# Altium PCB module-footprint.PcbDoc
Units mil, origin at the board's own origin, x right, y up, seen from the top; angles counter-clockwise.
Board outline 6000 x 4000 mil, 2 copper layers (Top Layer, Bottom Layer); 3 components, 0 nets, 93 pads, 0 vias.
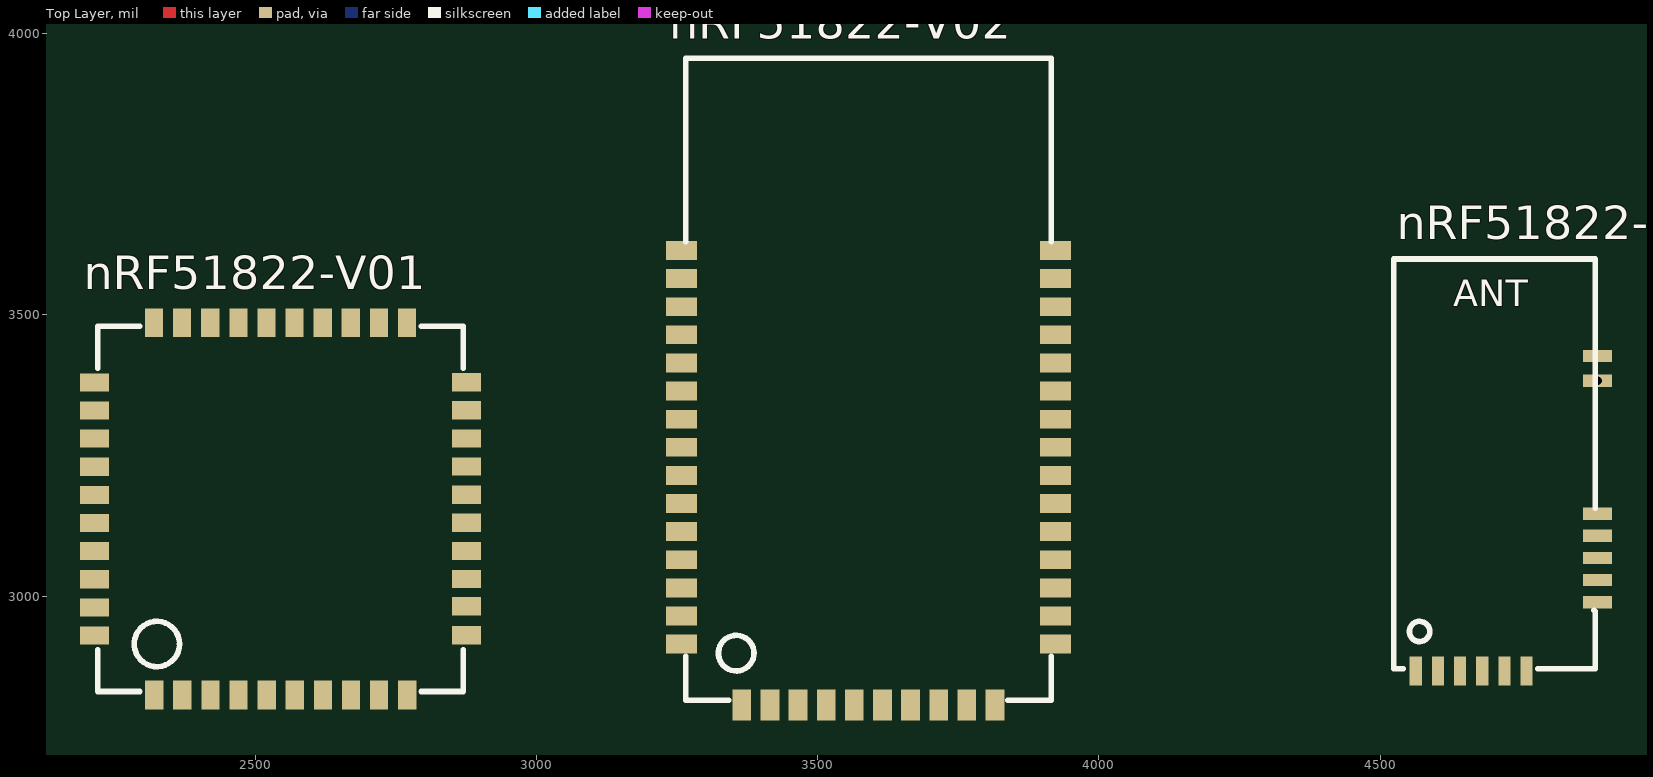
[diagram p0: Top Layer view]
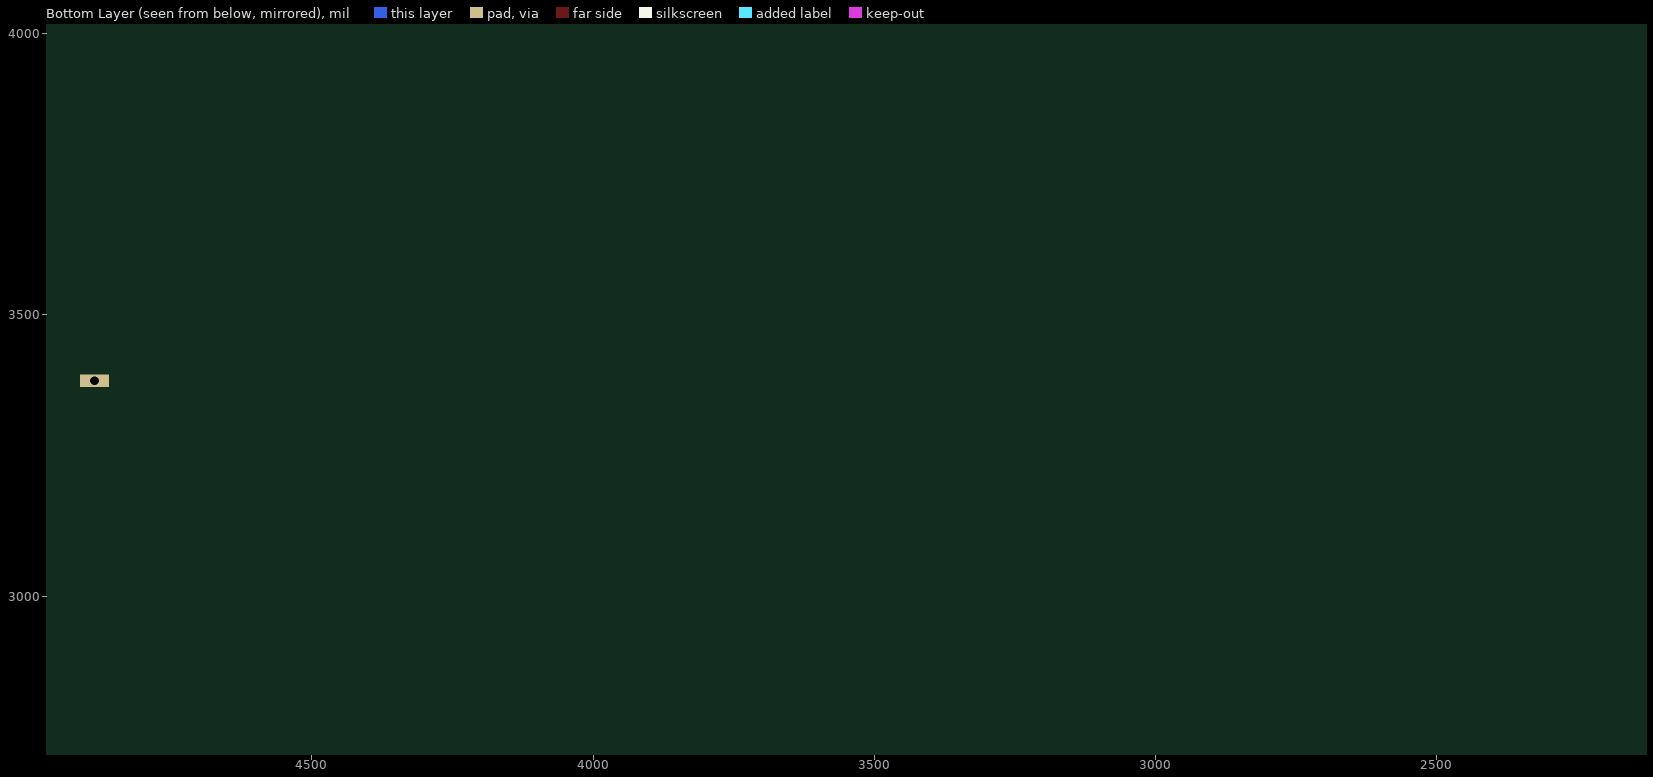
[diagram p1: Bottom Layer view, seen from below]

## Layer stack, top to bottom
Top Solder: solder mask 0.4, Solder Resist, Dk 3.5
Top Layer: signal copper 1.4
Dielectric 1: dielectric 12.6, FR-4, Dk 4.8
Bottom Layer: signal copper 1.4
Bottom Solder: solder mask 0.4, Solder Resist, Dk 3.5

## Board outline
1000,1000 7000,1000 7000,5000 1000,5000

## Design rules (kind name [scope] priority, off if disabled: settings)
Clearance [All] p1: gap=10
PolygonConnect [All] p1: connectstyle=Relief reliefconductorwidth=10 reliefentries=4 polygonreliefangle="90 Angle" airgapwidth=10
RoutingVias [All] p1: holewidth=28 width=50 viastyle="Through Hole" minholewidth=28 minwidth=50 maxholewidth=28 maxwidth=50
SolderMaskExpansion [All] p1: expansion=4
Width [All] p1: maxlimit=10 minlimit=10 preferedwidth=10
29 further rules are at their usual default settings.

## Components (designator, comment, footprint, x,y, rotation, side; value= is the part's Value field where it differs from the comment)
nRF51822-V01 "Comment" BLE-NRF01 2545,3155 r90 top
nRF51822-V02 "Comment" BLE-nRF02 3590,3405 r90 top
nRF51822-V04 "Comment" BLE-NRF04 4705,3235 r90 top

## Footprints (in the part's own frame and the unit in brackets; to place one, negate y for a bottom-side part, rotate by r counter-clockwise, add the part's x,y. Pads: shape width x height; smd on the part's side, far side on the other; paste and mask are expansions set on the pad)
BLE-NRF01 [mm]
  rect 1.3x0.82 smd: 1(-8.4,5.71) 2(-8.4,4.44) 3(-8.4,3.17) 4(-8.4,1.9) 5(-8.4,0.63) 6(-8.4,-0.64) 7(-8.4,-1.91) 8(-8.4,-3.18) 9(-8.4,-4.45) 10(-8.4,-5.72) 21(8.4,-5.71) 22(8.4,-4.44) 23(8.4,-3.17) 24(8.4,-1.9) 25(8.4,-0.63) 26(8.4,0.64) 27(8.4,1.91) 28(8.4,3.18) 29(8.4,4.45) 30(8.4,5.72)
  rect 0.82x1.3 smd: 11(-5.71,-8.4) 12(-4.4,-8.4) 13(-3.17,-8.4) 14(-1.9,-8.4) 15(-0.63,-8.4) 16(0.64,-8.4) 17(1.91,-8.4) 18(3.18,-8.4) 19(4.45,-8.4) 20(5.72,-8.4) 31(5.71,8.4) 32(4.44,8.4) 33(3.17,8.4) 34(1.9,8.4) 35(0.63,8.4) 36(-0.64,8.4) 37(-1.91,8.4) 38(-3.18,8.4) 39(-4.45,8.4) 40(-5.72,8.4)
  silkscreen extent -8.25,-8.25 8.25,8.25
BLE-nRF02 [mm]
  rect 1.4x0.85 smd: 1(-15.2,5.715) 2(-15.2,4.445) 3(-15.2,3.175) 4(-15.2,1.905) 5(-15.2,0.635) 6(-15.2,-0.635) 7(-15.2,-1.905) 8(-15.2,-3.175) 9(-15.2,-4.445) 10(-15.2,-5.715)
  rect 0.85x1.4 smd: 11(-12.46,-8.45) 12(-11.19,-8.45) 13(-9.92,-8.45) 14(-8.65,-8.45) 15(-7.38,-8.45) 16(-6.11,-8.45) 17(-4.84,-8.45) 18(-3.57,-8.45) 19(-2.3,-8.45) 20(-1.03,-8.45) 21(0.24,-8.45) 22(1.51,-8.45) 23(2.78,-8.45) 24(4.05,-8.45) 25(5.32,-8.45) 26(5.32,8.45) 27(4.05,8.45) 28(2.78,8.45) 29(1.51,8.45) 30(0.24,8.45) 31(-1.03,8.45) 32(-2.3,8.45) 33(-3.57,8.45) 34(-4.84,8.45) 35(-6.11,8.45) 36(-7.38,8.45) 37(-8.65,8.45) 38(-9.92,8.45) 39(-11.19,8.45) 40(-12.46,8.45)
  silkscreen extent -15,-8.25 14,8.25
BLE-NRF04 [mm]
  rect 1.3x0.55 smd: 1(-9.35,3.6) 2(-9.35,2.6) 3(-9.35,1.6) 4(-9.35,0.6) 5(-9.35,-0.4) 6(-9.35,-1.4)
  rect 0.55x1.3 smd: 7(-6.25,-4.6) 8(-5.25,-4.6) 9(-4.25,-4.6) 10(-3.25,-4.6) 11(-2.25,-4.6) 11(4.875,-4.6)
  rect 0.55x1.3 hole 0.4: 12(3.75,-4.6)
  silkscreen extent -9.25,-4.5 9.25,4.6

## Nets (pads, with @x,y where several pads share a name; then routed paths per layer and width w, separated by ;. In a path a pad name is that pad's centre, name@x,y a point inside that pad or via, vN(x,y) a via of type N, cw(c..) or ccw(c..) an arc to the next point about the centre after c; other vN are vias at no path point)
pads on no net: nRF51822-V01.1 nRF51822-V01.2 nRF51822-V01.3 nRF51822-V01.4 nRF51822-V01.5 nRF51822-V01.6 nRF51822-V01.7 nRF51822-V01.8 nRF51822-V01.9 nRF51822-V01.10 nRF51822-V01.11 nRF51822-V01.12 nRF51822-V01.13 nRF51822-V01.14 nRF51822-V01.15 nRF51822-V01.16 nRF51822-V01.17 nRF51822-V01.18 nRF51822-V01.19 nRF51822-V01.20 nRF51822-V01.21 nRF51822-V01.22 nRF51822-V01.23 nRF51822-V01.24 nRF51822-V01.25 nRF51822-V01.26 nRF51822-V01.27 nRF51822-V01.28 nRF51822-V01.29 nRF51822-V01.30 nRF51822-V01.31 nRF51822-V01.32 nRF51822-V01.33 nRF51822-V01.34 nRF51822-V01.35 nRF51822-V01.36 nRF51822-V01.37 nRF51822-V01.38 nRF51822-V01.39 nRF51822-V01.40 nRF51822-V02.1 nRF51822-V02.2 nRF51822-V02.3 nRF51822-V02.4 nRF51822-V02.5 nRF51822-V02.6 nRF51822-V02.7 nRF51822-V02.8 nRF51822-V02.9 nRF51822-V02.10 nRF51822-V02.11 nRF51822-V02.12 nRF51822-V02.13 nRF51822-V02.14 nRF51822-V02.15 nRF51822-V02.16 nRF51822-V02.17 nRF51822-V02.18 nRF51822-V02.19 nRF51822-V02.20 nRF51822-V02.21 nRF51822-V02.22 nRF51822-V02.23 nRF51822-V02.24 nRF51822-V02.25 nRF51822-V02.26 nRF51822-V02.27 nRF51822-V02.28 nRF51822-V02.29 nRF51822-V02.30 nRF51822-V02.31 nRF51822-V02.32 nRF51822-V02.33 nRF51822-V02.34 nRF51822-V02.35 nRF51822-V02.36 nRF51822-V02.37 nRF51822-V02.38 nRF51822-V02.39 nRF51822-V02.40 nRF51822-V04.1 nRF51822-V04.2 nRF51822-V04.3 nRF51822-V04.4 nRF51822-V04.5 nRF51822-V04.6 nRF51822-V04.7 nRF51822-V04.8 nRF51822-V04.9 nRF51822-V04.10 nRF51822-V04.11 nRF51822-V04.12

## Text inside footprints (layer, text, board x,y; h text height)
nRF51822-V04: Top Overlay "ANT" at 4630,3515 h47.24